# Altium PCB PlantSensor_V02_PCB.PcbDoc
Units mm, origin at the board's own origin, x right, y up, seen from the top; angles counter-clockwise.
Board outline 22 x 98 mm, 2 copper layers (Top Layer, Bottom Layer); 22 components, 16 nets, 85 pads, 19 vias.
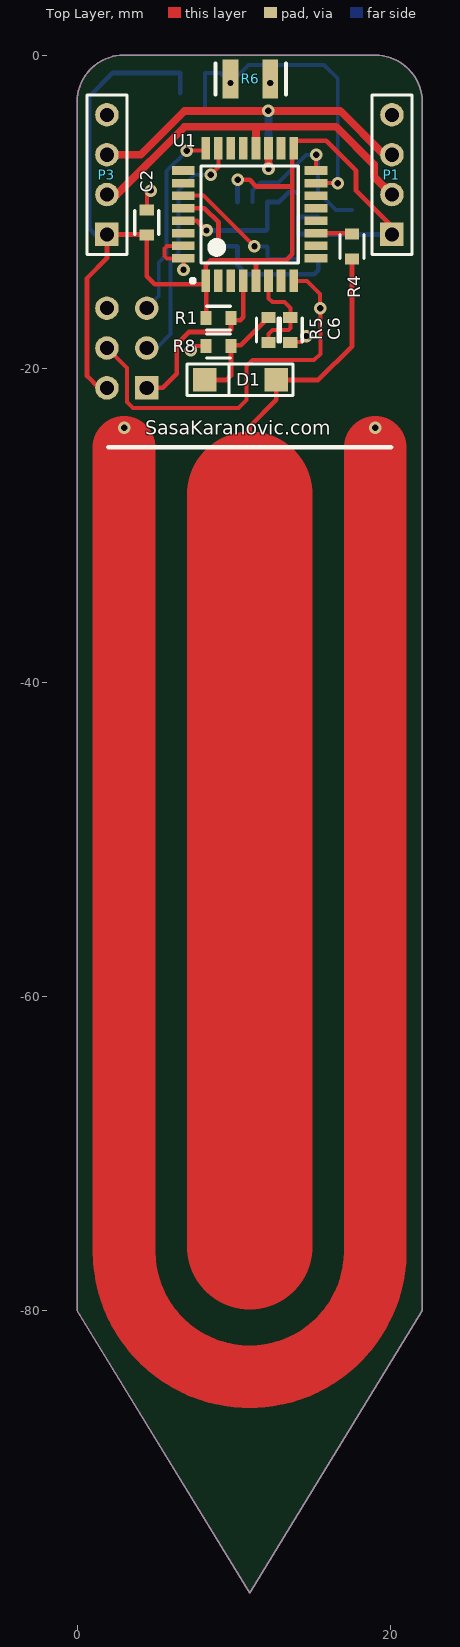
[diagram p0: Top Layer view]
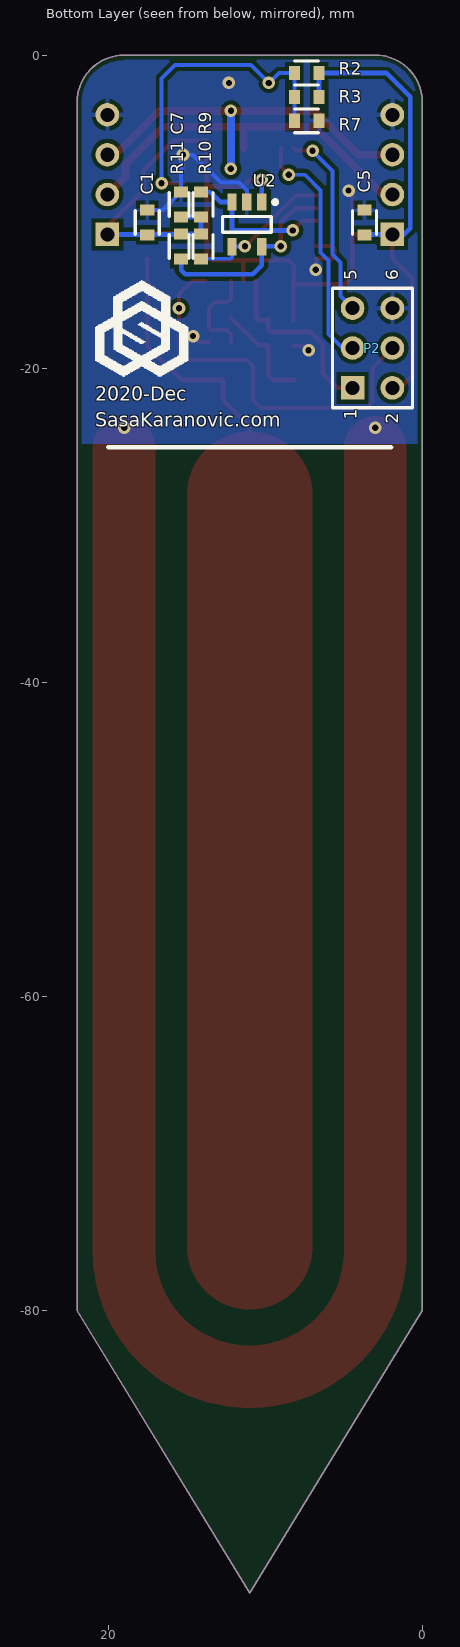
[diagram p1: Bottom Layer view, seen from below]
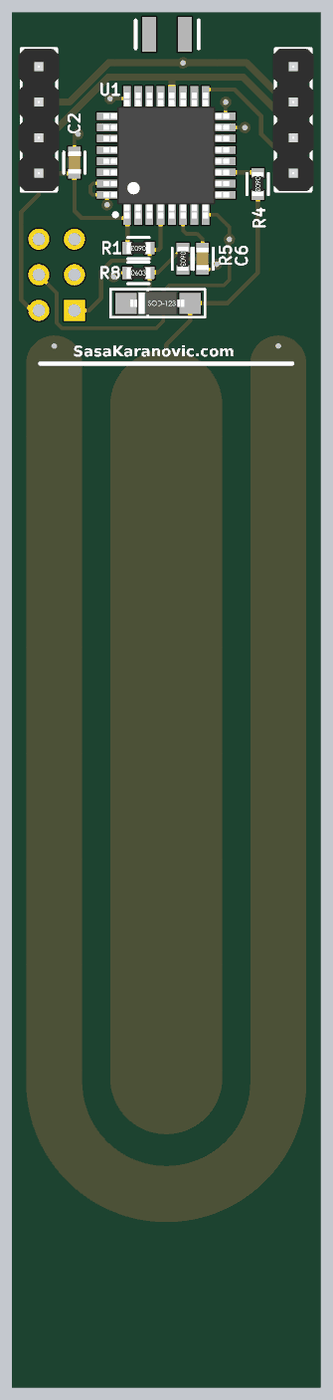
[diagram p2: 3D render of the assembled board from above, using the file's embedded part models]
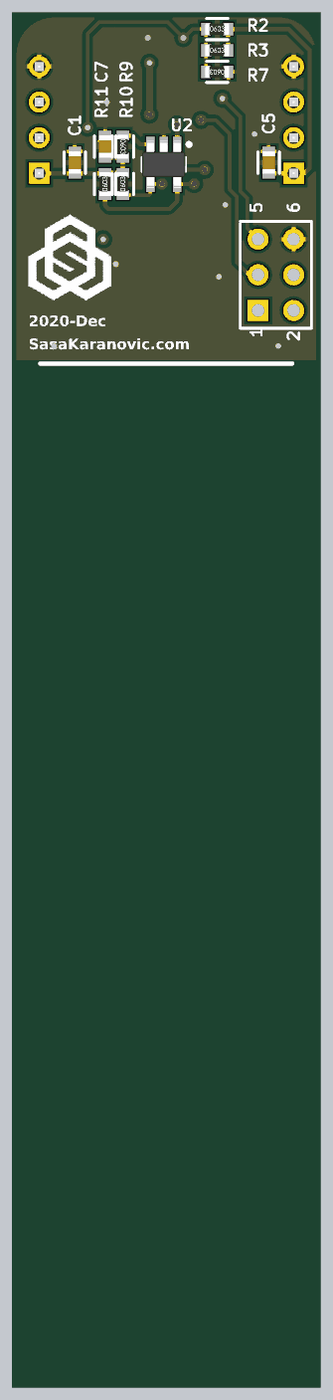
[diagram p3: 3D render of the assembled board from below, using the file's embedded part models]

## Layer stack, top to bottom
Top Solder: solder mask 0.0102, Solder Resist, Dk 3.5
Top Layer: signal copper 0.0356
Dielectric 1: dielectric 0.32, FR-4, Dk 4.8
Bottom Layer: signal copper 0.0356
Bottom Solder: solder mask 0.0102, Solder Resist, Dk 3.5

## Board outline
0,-80 11,-98 22,-80 22,-80.01 22,-3.01 ccw(c19,-3.01) 19,-0.01 18.99,0 3,0 ccw(c3,-3) 0,-3

## Design rules (kind name [scope] priority, off if disabled: settings)
Clearance Clearance_1 [InNamedPolygon('GND_L02_P000')] p1: gap=0.254 ignorepadtopadclearanceinfootprint=FALSE except(0: Arc-Hole Track-Hole SMDPad-Hole THPad-Hole Via-Hole Fill-Hole Poly-Hole Region-Hole Text-Hole)
Clearance [All] p2: gap=0.152 ignorepadtopadclearanceinfootprint=FALSE
HoleSize [All] p1: absolutevalues=TRUE maxlimit=50 minlimit=0.4 maxpercent=80.000 minpercent=20.000
MinimumSolderMaskSliver [All] p1 off: minsoldermaskwidth=0.1
PlaneConnect [All] p1: pad.planeconnectstyle=Relief pad.reliefexpansion=0.508 pad.reliefentries=4 pad.reliefconductorwidth=0.254 pad.reliefairgap=0.254 via.planeconnectstyle=Direct via.reliefexpansion=0.508 via.reliefentries=4 via.reliefconductorwidth=0.254 via.reliefairgap=0.254
PolygonConnect [All] p1: thpad.connectstyle=Relief thpad.reliefconductorwidth=0.3 thpad.reliefentries=4 thpad.polygonreliefangle="90 Angle" thpad.airgapwidth=0.254 smdpad.connectstyle=Relief smdpad.reliefconductorwidth=0.254 smdpad.reliefentries=4 smdpad.polygonreliefangle="90 Angle" smdpad.airgapwidth=0.254 via.connectstyle=Direct via.reliefconductorwidth=0.254 via.reliefentries=4 via.polygonreliefangle="90 Angle" via.airgapwidth=0.254
RoutingVias [All] p1: holewidth=0.8 width=0.8 viastyle="Through Hole" minholewidth=0.3 minwidth=0.6 maxholewidth=0.4 maxwidth=50
SilkToSilkClearance [All] p1 off: silktosilkclearance=0.1
SilkToSolderMaskClearance [IsPad] p1 off: minsilkscreentomaskgap=0.1 clearancetoexposedcopper=TRUE
SolderMaskExpansion [All] p1: expansion=0.102 istentingtop=FALSE
Width [All] p1: maxlimit=50 minlimit=0.154 preferedwidth=0.2
25 further rules are at their usual default settings.

## Components (designator, comment, footprint, x,y, rotation, side; value= is the part's Value field where it differs from the comment)
C1 "Cap" "0603 - CAP" 17.526,-10.668 r270 bottom value=100n
C2 "Cap" "0603 - CAP" 4.445,-10.668 r270 top value=100n
C5 "Cap" "0603 - CAP" 3.683,-10.668 r270 bottom value=100n
C6 "Cap" "0603 - CAP" 13.589,-17.526 r90 top value=100n
C7 "Cap" "0603 - CAP" 15.367,-9.525 r270 bottom value=100n
D1 "1N4148" SOD123 10.414,-20.701 r180 top
P1 "Header 4" "Header 4x1" 20.066,-11.43 r90 top locked
P2 "Header 3X2" HDR2X3 4.445,-21.209 r90 bottom
P3 "Header 4" "Header 4x1" 1.905,-11.43 r90 top locked
R1 "Res" 0603 9.017,-16.764 r180 top value=4K7
R2 "Res" 0603 7.366,-1.143 r180 bottom value=10K
R3 "Res" 0603 7.366,-2.667 r180 bottom value=DNP
R4 "Res" 0603 17.526,-12.192 r270 top value=1K
R5 "Res" 0603 12.192,-17.526 r270 top value=0R
R6 "Res" "RADIAL0.1 - SMT" 12.319,-1.524 r180 top value="10K LDR"
R7 "Res" 0603 7.366,-4.191 r0 bottom value=10K
R8 "Res" 0603 9.017,-18.542 r0 top value=1M
R9 "Res" 0603 14.097,-9.525 r270 bottom value=4K7
R10 "Res" 0603 14.097,-12.192 r90 bottom value=4K7
R11 "Res" 0603 15.367,-12.192 r90 bottom value=4K7
U1 "STM32L011K4" TQFP80P900X900X160-32N 11,-10.16 r90 top
U2 "MCP9800A0T" SOT95P270X145-5N 11.176,-10.795 r270 bottom

## Footprints (in the part's own frame and the unit in brackets; to place one, negate y for a bottom-side part, rotate by r counter-clockwise, add the part's x,y. Pads: shape width x height; smd on the part's side, far side on the other; paste and mask are expansions set on the pad)
0603 [mm]
  rect 0.7x0.9 smd: 1(-0.79,0) 2(0.79,0)
  silkscreen extent -0.76,-0.76 0.76,0.76, body extent -0.85,-0.4 0.85,0.4, height 0.56
"0603 - CAP" [mm]
  rect 0.7x0.9 smd: 1(-0.79,0) 2(0.79,0)
  silkscreen extent -0.76,-0.76 0.76,0.76, body extent -0.8,-0.44 0.8,0.46, height 0.8
HDR2X3 [mm] "Connector; Header; 3x2 Position"
  rect 1.5x1.5 hole 0.9: 1(0,0)
  round 1.5 hole 0.9: 2(0,-2.54) 3(2.54,0) 4(2.54,-2.54) 5(5.08,0) 6(5.08,-2.54)
  silkscreen extent -1.27,-3.81 6.35,1.27
"Header 4x1" [mm] "Connector; Header; 4 Position"
  rect 1.5x1.5 hole 0.9: 1(0,0)
  round 1.5 hole 0.9: 2(2.54,0) 3(5.08,0) 4(7.62,0)
  silkscreen extent -1.27,-1.27 8.89,1.27, body extent -1.27,-1.46 8.89,1.46, height 8.51
"RADIAL0.1 - SMT" [mm] "Razmak 2.54"
  rect 1x2.5 smd: 1(0,0) 2(2.54,0)
  silkscreen extent -1,-1 3.5,1
SOD123 [mm]
  rect 1.5x1.5 smd: A(-2.286,0) K(2.286,0)
  silkscreen extent -3.35,-1.02 3.4,0.99, body extent -1.87,-0.86 1.98,0.84, height 1.47
SOT95P270X145-5N [mm] "SOT23, 5-Leads, Body 2.90x2.70mm, Pitch 0.95mm, IPC Medium Density"
  rect 1.1x0.6 smd: 1(-1.425,0.95) 2(-1.425,0) 3(-1.425,-0.95) 4(1.425,-0.95) 5(1.425,0.95)
  silkscreen extent -1.55,-1.55 0.5,1.92, body extent -1.7,-1.55 1.7,1.55, height 1.45
TQFP80P900X900X160-32N [mm] "TQFP, 32-Leads, Body 7.00x7.00mm, Pitch 0.80mm, IPC Medium Density"
  rect 1.45x0.55 smd: 1(-4.225,2.8) 2(-4.225,2) 3(-4.225,1.2) 4(-4.225,0.4) 5(-4.225,-0.4) 6(-4.225,-1.2) 7(-4.225,-2) 8(-4.225,-2.8) 17(4.225,-2.8) 18(4.225,-2) 19(4.225,-1.2) 20(4.225,-0.4) 21(4.225,0.4) 22(4.225,1.2) 23(4.225,2) 24(4.225,2.8)
  rect 0.55x1.45 smd: 9(-2.8,-4.225) 10(-2,-4.225) 11(-1.2,-4.225) 12(-0.4,-4.225) 13(0.4,-4.225) 14(1.2,-4.225) 15(2,-4.225) 16(2.8,-4.225) 25(2.8,4.225) 26(2,4.225) 27(1.2,4.225) 28(0.4,4.225) 29(-0.4,4.225) 30(-1.2,4.225) 31(-2,4.225) 32(-2.8,4.225)
  silkscreen extent -4.35,-3.1 3.1,3.75, body extent -4.5,-4.5 4.5,4.5, height 1.6

## Part data
C1 C2 C5 C6 C7: "CAP CER 0.1UF 50V X7R 0603", Distributor Part Number=1276-CL10B104KB8NNNLCT-ND, Manufacturer="Samsung Electro-Mechanics", Manufacturer Part Number=CL10B104KB8NNNL, Distributor=DigiKey
D1: library part Diode, "DIODE GEN PURP 100V 300MA SOD123", Distributor Part Number=1N4148W-FDICT-ND, Manufacturer="Diodes Incorporated", Manufacturer Part Number=1N4148W-7-F, Distributor=DigiKey
P1 P3: "CONN HEADER VERT 4POS 2.54MM", Distributor Part Number=732-5317-ND, Manufacturer="Würth Elektronik", Manufacturer Part Number=61300411121, Distributor=DigiKey
P2: "CONN HEADER VERT 6POS 2.54MM", Distributor Part Number=2057-PH2-06-UA-ND, Manufacturer="Adam Tech", Manufacturer Part Number=PH2-06-UA, Distributor=DigiKey
R1 R9 R10 R11: "RES SMD 4.7K OHM 1% 1/10W 0603", Distributor Part Number=311-4.70KHRCT-ND, Manufacturer=Yageo, Manufacturer Part Number=RC0603FR-074K7L, Distributor=DigiKey
R2 R7: "RES SMD 10K OHM 1% 1/10W 0603", Distributor Part Number=311-10KLDCT-ND, Manufacturer=Yageo, Manufacturer Part Number=AC0603FR-0710KL, Distributor=DigiKey
R3: "Resistor", Distributor=DigiKey
R4: "RES SMD 1K OHM 1% 1/10W 0603", Distributor Part Number=YAG2323CT-ND, Manufacturer=Yageo, Manufacturer Part Number=RT0603FRE071KL, Distributor=DigiKey
R5: "RES SMD 0 OHM JUMPER 1/10W 0603", Distributor Part Number=311-0.0LECT-ND, Manufacturer=Yageo, Manufacturer Part Number=AC0603JR-070RL, Distributor=DigiKey
R6: "PHOTOCELL CDS 400OHM TO-18", Distributor Part Number=NSL-5152-ND, Manufacturer="Advanced Photonix", Manufacturer Part Number=NSL-5152, Distributor=DigiKey
R8: "RES SMD 1M OHM 5% 1/10W 0603", Distributor Part Number=311-1.0MGRCT-ND, Manufacturer=Yageo, Manufacturer Part Number=RC0603JR-071ML, Distributor=DigiKey
U1: "IC MCU 32BIT 16KB FLASH 32LQFP", Distributor Part Number=497-17480-ND, Manufacturer=STMicroelectronics, Manufacturer Part Number=STM32L011K4T6, Distributor=DigiKey
U2: library part MCP9800A0T-M/OT, "SENSOR DIGITAL -55C-125C SOT23-5", Distributor Part Number=MCP9800A0T-M/OTCT-ND, Manufacturer="Microchip Technology", Distributor=DigiKey, Manufacturer Part Number=MCP9800A0T-M/OT

## Via types
v1: diameter 0.8, hole 0.4, Top Layer to Bottom Layer, tented both sides, 17 vias
v2: diameter 0.8, hole 0.4, Top Layer to Bottom Layer, tented bottom, 2 vias

## Nets (pads, with @x,y where several pads share a name; then routed paths per layer and width w, separated by ;. In a path a pad name is that pad's centre, name@x,y a point inside that pad or via, vN(x,y) a via of type N, cw(c..) or ccw(c..) an arc to the next point about the centre after c; other vN are vias at no path point)
3V3: C1.2 C2.2 C5.2 C7.2 P1.1 P2.2 P3.1 R1.2 R2.2 R3.2 R9.2 R10.2 R11.2 U1.1 U1.5 U1.17 U2.1 | length 80.6
  Top Layer w0.3: P2.2 1.397,-21.209 0.635,-20.447 0.635,-14.224 1.905,-12.954 P3.1 4.417,-11.43 C2.2 4.445,-14.097 4.953,-14.605 U1.1@8.227,-14.605 ; R1.2@8.227,-16.891 R1.2 U1.1@8.227,-14.605 ; v1(10.234,-7.948) 10.996,-7.948 11.43,-8.382 13.716,-8.382 ; U1.5 11.4,-13.081 ; P1.1 20.066,-10.922 17.78,-8.636 17.78,-7.366 15.875,-5.461 13.716,-5.461 13.716,-8.382 ; U1.1@8.227,-14.605 8.227,-14.412 U1.1 8.2,-13.39 8.509,-13.081 11.4,-13.081 ; 11.4,-13.081 13.335,-13.081 13.716,-12.7 13.716,-8.382
  Bottom Layer w0.3: C5.2 3.655,-11.43 P3.1 1.143,-11.43 0.762,-11.049 0.762,-2.667 2.286,-1.143 R2.2 R3.2@6.576,-2.413 ; U2.1 v1@10.226,-7.94 ; C7.2 R9.2 R10.2 R11.2 15.395,-11.43 P1.1
CS_ADC: C6.2 R5.2 U1.6 | length 6.1
  Top Layer w0.254: R5.2 12.192,-17.78 12.446,-17.526 13.462,-17.526 13.589,-17.399 C6.2 13.589,-16.129 13.208,-15.748 12.446,-15.748 12.2,-15.502 U1.6
FOUT: R4.1 U1.11 | length 2.3
  Top Layer w0.3: U1.11 17.484,-11.36 R4.1
GND: C1.1 C2.1 C5.1 C6.1 C7.1 P1.4 P2.6 P3.4 R6.1 R7.1 R8.1 U1.16 U1.31 U1.32 U2.2 | length 146.7
  Top Layer w0.254: C2.1 4.445,-8.89 v1(4.699,-8.636) ; v1@6.775,-13.672 U1.32 6.769,-12.954 5.737,-12.954 5.588,-12.805 5.588,-12.319 5.747,-12.16 U1.31 ; v1@7.239,-18.796 7.493,-18.542 R8.1 ; C6.1@13.589,-18.288 14.224,-18.288 v1(14.605,-17.907) ; U1.16 v1@15.225,-6.358
  Top Layer w4: 3,-25 3,-76.327 ccw(c11,-76.22) 19,-76.327 19,-25
  Bottom Layer w0.254: U2.2 11.176,-8.636 11.684,-8.128 12.827,-8.128 14.597,-6.358 v1(15.248,-6.358) 15.367,-6.477 C7.1 16.51,-9.878 C1.1
  other v1: 3,-23.749 19,-23.749 7.247,-18.804 6.783,-13.68
  other v2: 12.319,-1.778
I2C_SCL: P1.3 P3.3 U1.19 | length 25.5
  Top Layer w0.5: P3.3 4.064,-6.35 6.858,-3.556 v1(12.192,-3.556) 16.764,-3.556 19.558,-6.35 P1.3 ; v1(12.2,-7.239) U1.19
  Bottom Layer w0.5: v1(12.192,-3.556) 12.192,-7.231 v1(12.2,-7.239)
I2C_SDA: P1.2 P3.2 U1.20 | length 23.6
  Top Layer w0.5: P3.2 2.54,-8.89 6.858,-4.572 11.43,-4.572 ; U1.20 11.4,-4.602 11.43,-4.572 ; P1.2 18.923,-7.747 18.923,-6.985 16.51,-4.572 11.43,-4.572
LDR_ADC: R2.1 R3.1 R6.2 R7.2 U1.15 | length 20.1
  Top Layer w0.25: U1.15 v1@16.605,-8.16
  Bottom Layer w0.25: 8.156,-3.683 R3.1 R2.1 9.144,-1.143 v2(9.779,-1.778) 10.922,-0.635 15.748,-0.635 16.613,-1.5 v1(16.613,-8.168)
NetD1_K: D1.K R5.1 R8.2 | length 6.8
  Top Layer w0.3: D1.K 9.525,-20.701 9.807,-20.419 R8.2 9.852,-18.497 10.431,-18.497 R5.1
nRST: P2.1 R1.1 U1.4 | length 11.9
  Top Layer w0.3: P2.1 5.461,-21.209 6.35,-20.32 6.35,-18.415 7.112,-17.653 9.652,-17.653 9.807,-17.498 R1.1@9.807,-16.891 ; R1.1 R1.1@9.807,-16.891 ; U1.4 10.6,-16.705 10.414,-16.891 R1.1@9.807,-16.891
SENS_PAD: D1.A R4.2 | length 67.2
  Top Layer w0.3: 11,-28 11,-23.671 12.7,-21.971 D1.A 15.367,-20.701 17.526,-18.542 R4.2
  Top Layer w8: 11,-75.946 11,-28
SWD_TCK: P2.3 U1.23 | length 15.6
  Top Layer w0.254: v1@8.509,-7.62 9,-7.129 U1.23
  Bottom Layer w0.254: P2.3 5.08,-18.669 5.969,-17.78 5.969,-13.081 6.477,-12.573 6.477,-8.636 7.485,-7.628 v1(8.517,-7.628)
SWD_TMS: P2.5 U1.24 | length 12.4
  Top Layer w0.254: v1@6.985,-6.096 8.039,-6.096 U1.24
  Bottom Layer w0.254: P2.5 5.207,-15.367 5.207,-13.208 5.715,-12.7 5.715,-7.382 v1(6.993,-6.104)
TMP_ALERT: R9.1 U1.29 U2.3 | length 9.6
  Top Layer w0.3: U1.29 7.639,-10.56 v1(8.255,-11.176)
  Bottom Layer w0.3: v1(8.255,-11.176) 12.06,-11.176 12.126,-11.11 U2.3 12.855,-9.37 13.49,-8.735 R9.1
TMP_SCL: R10.1 U1.27 U2.4 | length 9.4
  Top Layer w0.25: U1.27 8.071,-8.96 v1(11.303,-12.192)
  Bottom Layer w0.25: v1(11.303,-12.192) 12.098,-12.192 U2.4 12.126,-12.888 12.22,-12.982 R10.1
TMP_SDA: R11.1 U1.28 U2.5 | length 12.8
  Top Layer w0.3: U1.28 8.109,-9.76 9.017,-10.668 v1(9.017,-12.192)
  Bottom Layer w0.3: v1(9.017,-12.192) 10.198,-12.192 U2.5 10.226,-13.401 10.795,-13.97 15.113,-13.97 15.367,-13.716 R11.1
USART_TXD: P2.4 U1.8 | length 25
  Top Layer w0.254: P2.4 3.175,-19.939 3.175,-22.098 3.556,-22.479 10.287,-22.479 10.795,-21.971 10.795,-19.812 11.176,-19.431 15.113,-19.431 15.502,-19.042 v1(15.502,-16.137) ; U1.8 14.639,-14.385 15.494,-15.24 v1@15.494,-16.129
pads on no net: U1.2 U1.3 U1.7 U1.9 U1.10 U1.12 U1.13 U1.14 U1.18 U1.21 U1.22 U1.25 U1.26 U1.30

## Polygon pours and split planes (outlines as drawn)
GND on Bottom Layer "GND_L02_P000" (solid, remove dead copper, pour order 0): -0.635,0.635 -0.635,-24.765 22.225,-24.765 22.225,0.635

## Keep-outs
Keep-Out Layer:
  lines w0.1: 18.99,0 3,0 ccw(c3,-3) 0,-3 0,-80 11,-98 22,-80 ; 19,-0.01 cw(c19,-3.01) 22,-3.01 22,-80.01

## Silkscreen, mask and mechanical layers (free items; w line width, h text height)
Top Overlay:
  lines w0.3: 2,-25 20,-25
  text "SasaKaranovic.com" at 4.345,-24.49 h1.5
Bottom Overlay:
  drawing of 2 lines, arcs and shapes, not listed
  text "2020-Dec" at 20.828,-22.331 h1.5
  text "SasaKaranovic.com" at 20.828,-23.982 h1.5
Drill Drawing:
  lines w0.2: 0,-3 cw(c3,-3) 3,0 ; 0,-2.973 0,-80 11,-98 22,-80 22,-3 ccw(c19,-3) 19,0 2.973,0

## Text inside footprints (layer, text, board x,y; h text height)
P2: Bottom Overlay "1" at 4.191,-23.241 h0.8 r270; Bottom Overlay "2" at 1.524,-23.495 h0.8 r270; Bottom Overlay "5" at 4.191,-14.351 h0.8 r270; Bottom Overlay "6" at 1.524,-14.351 h0.8 r270